# Altium PCB Flasher_2Ch_Astable.PcbDoc
Units mm, origin at the board's own origin, x right, y up, seen from the top; angles counter-clockwise.
Board outline 60 x 45 mm, 2 copper layers (Top Layer, Bottom Layer); 31 components, 16 nets, 65 pads, 0 vias.
Unrouted connection lines stored in the file: 1.
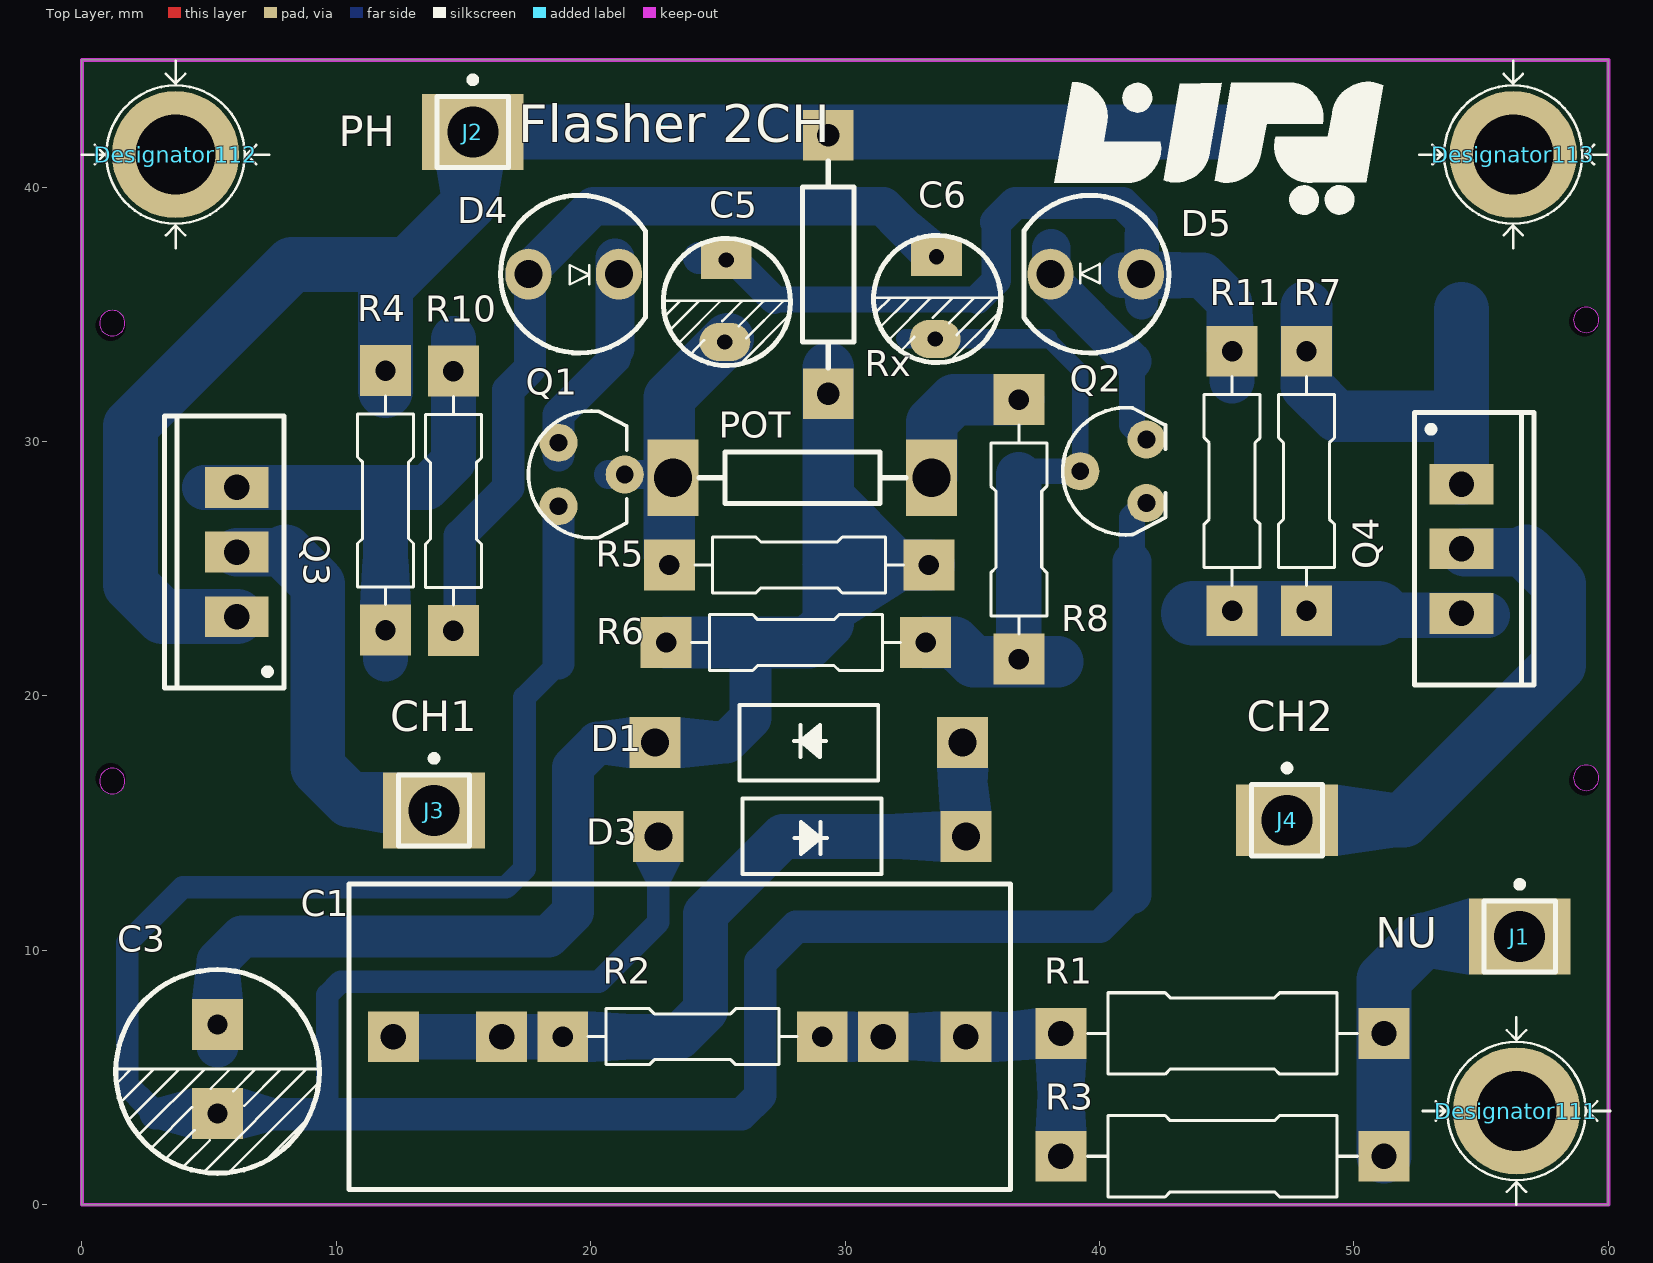
[diagram p0: Top Layer view]
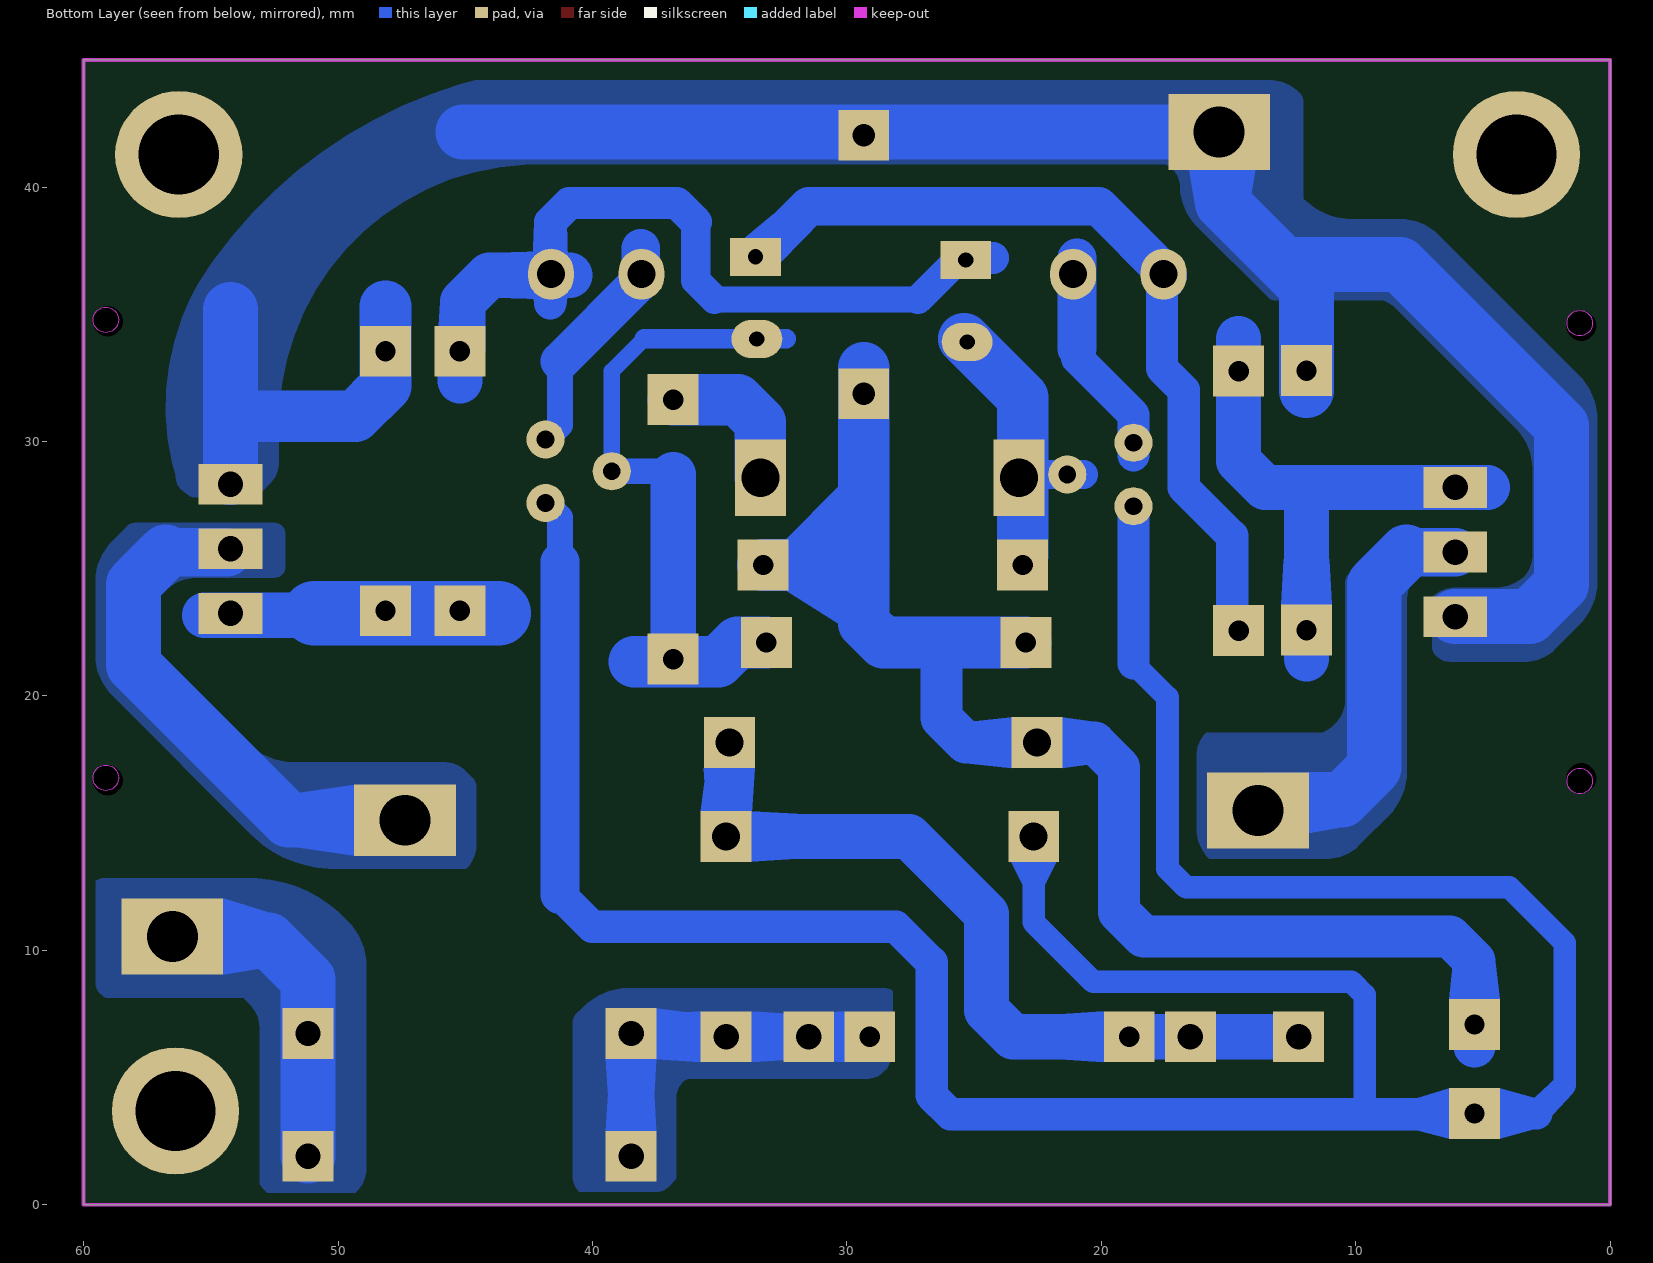
[diagram p1: Bottom Layer view, seen from below]
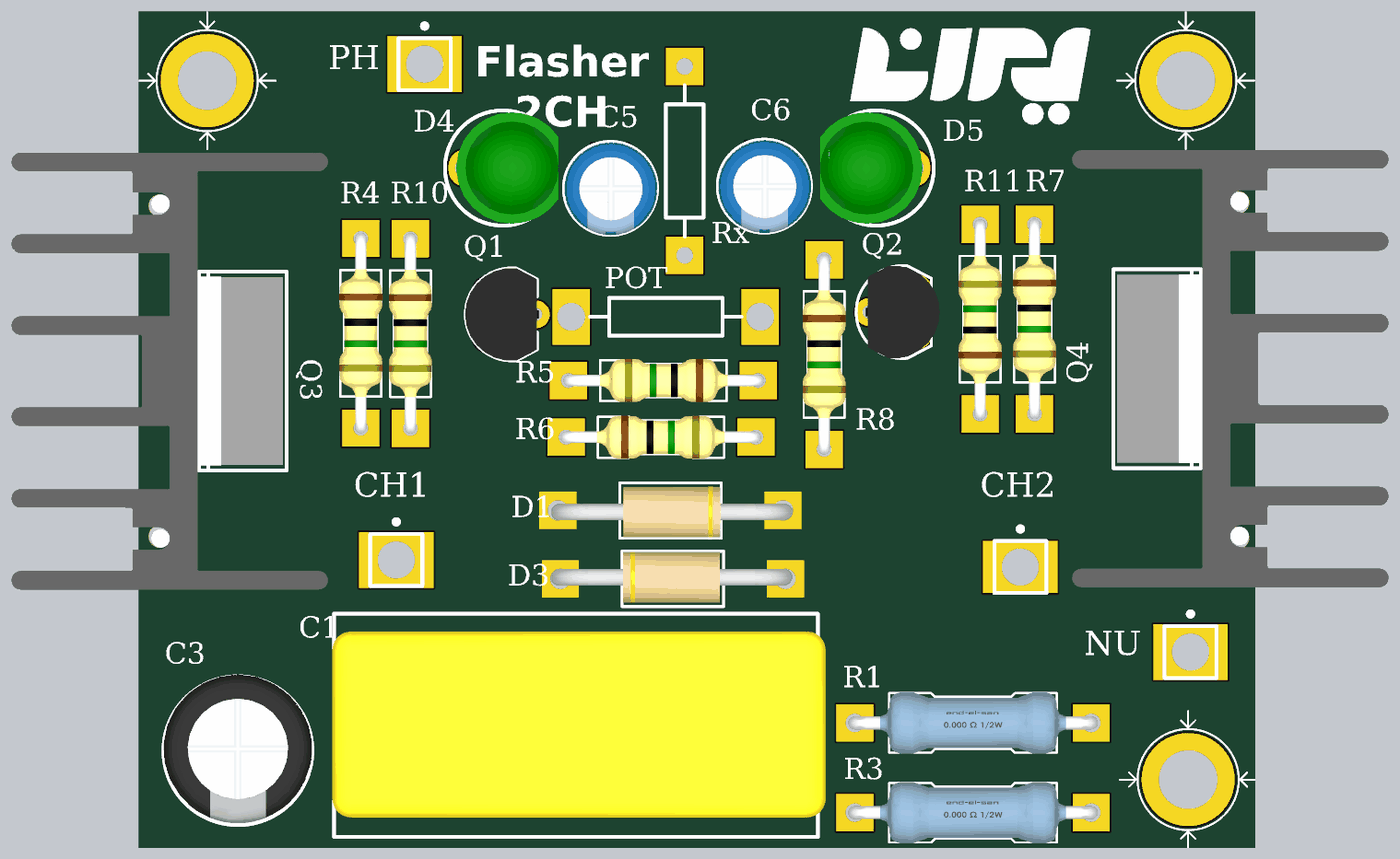
[diagram p2: 3D render of the assembled board from above, using the file's embedded part models]

## Layer stack, top to bottom
Top Solder: solder mask 0.0102, Solder Resist, Dk 3.5
Top Layer: signal copper 0.0356
Dielectric 1: dielectric 0.32, FR-4, Dk 4.8
Bottom Layer: signal copper 0.0356
Bottom Solder: solder mask 0.0102, Solder Resist, Dk 3.5

## Board outline
0,0 60,0 60,45 0,45

## Design rules (kind name [scope] priority, off if disabled: settings)
Clearance [All] p1: gap=0.381 ignorepadtopadclearanceinfootprint=TRUE except(0.254: Arc-THPad Track-THPad THPad-THPad; 0.279: Arc-Arc Arc-Track Track-Track)
PolygonConnect [All] p1: connectstyle=Direct reliefconductorwidth=0.254 reliefentries=4 polygonreliefangle="90 Angle" airgapwidth=0.254
RoutingVias [All] p1: holewidth=0.711 width=1.27 viastyle="Through Hole" minholewidth=0.711 minwidth=1.27 maxholewidth=0.711 maxwidth=1.27
SolderMaskExpansion [All] p1: expansion=0.102 istentingtop=FALSE
Width [All] p1: maxlimit=5.08 minlimit=0.254 preferedwidth=1.27 minimp=50.000000 maximp=50.000000 favimp=50.000000
30 further rules are at their usual default settings.

## Classes and differential pairs
component class Flasher_2Ch_Astable: C1 C3 C5 C6 D1 D3 D4 D5 J1 J2 J3 J4 POT Q1 Q2 Q3 Q4 R1 R2 R3 R4 R5 R6 R7 R8 R10 R11 Rx

## Components (designator, comment, footprint, x,y, rotation, side; value= is the part's Value field where it differs from the comment)
C1 "Cap" Cap_polyester_275V_P22.5 23.495,6.604 r0 top value=1uF/275V/X2
C3 "Cap2" "Cap electrolitic radial 8x12-3.5" 5.334,5.334 r270 top value=470uF/16V
C5 "Cap2" "CAP ELECTROLITIC RADIAL 5X11-2" 25.3,35.523 r270 top value=100uF/16V
C6 "Cap2" "CAP ELECTROLITIC RADIAL 5X11-2" 33.567,35.643 r270 top value=100uF/16V
D1 "Diode 1N4007" DO-204AL 28.702,18.288 r180 top
D3 "Diode 1N4007" DO-204AL 28.575,14.351 r0 top
D4 "LED0" LED5MM_RED 19.558,36.576 r0 top
D5 "LED0" LED5MM_RED 39.624,36.576 r180 top
Designator111 "Comment" "Board Screw simple 3mm" 56.388,3.683 r0 top
Designator112 "Comment" "Board Screw simple 3mm" 3.683,41.275 r0 top
Designator113 "Comment" "Board Screw simple 3mm" 56.261,41.275 r0 top
J1 "Socket" PIN1#1 56.515,10.541 r0 top
J2 "Socket" PIN1#1 15.367,42.164 r0 top
J3 "Socket" PIN1#1 13.843,15.494 r0 top
J4 "Socket" PIN1#2 47.371,15.113 r0 top
POT "Res Adj1" AXIAL-0.4 28.321,28.575 r0 top value=10K
Q1 "2N3904" "TO-92 CF REV" 19.936,28.702 r90 top
Q2 "2N3904" "TO-92 CF" 40.643,28.829 r270 top
Q3 "BT137-600" "TO-220 AB with heatsink ya25" 6.096,25.654 r90 top
Q4 "BT137-600" "TO-220 AB with heatsink ya25" 54.229,25.781 r270 top
R1 "Res1" "Axial 0_5W 5_0mm" 44.831,6.731 r0 top value=100/0.5W
R2 "Res1" "Axial 0_25 W, 0_4 IN LEAD PITCH" 24.003,6.604 r0 top value=470K
R3 "Res1" "Axial 0_5W 5_0mm" 44.831,1.905 r0 top value=100/0.5W
R4 "Res1" "Axial 0_25 W, 0_4 IN LEAD PITCH" 11.938,27.686 r270 top value="100 5%"
R5 "Res1" "Axial 0_25 W, 0_4 IN LEAD PITCH" 28.194,25.146 r180 top value=39K
R6 "Res1" "Axial 0_25 W, 0_4 IN LEAD PITCH" 28.067,22.098 r0 top value=39K
R7 "Res1" "Axial 0_25 W, 0_4 IN LEAD PITCH" 48.133,28.448 r270 top value="100 5%"
R8 "Res1" "Axial 0_25 W, 0_4 IN LEAD PITCH" 36.83,26.543 r270 top value=680R
R10 "Res1" "Axial 0_25 W, 0_4 IN LEAD PITCH" 14.605,27.666 r270 top value=560R
R11 "Res1" "Axial 0_25 W, 0_4 IN LEAD PITCH" 45.212,28.448 r90 top value=560R
Rx "Res1" axial-0.4 29.337,36.957 r90 top value=0R

## Footprints (in the part's own frame and the unit in brackets; to place one, negate y for a bottom-side part, rotate by r counter-clockwise, add the part's x,y. Pads: shape width x height; smd on the part's side, far side on the other; paste and mask are expansions set on the pad)
"Axial 0_5W 5_0mm" [mm] "Designer Abbas Basereh"
  rect 2x2 hole 1: 1(6.35,0) 2(-6.35,0)
  silkscreen extent -5.3,-1.6 5.3,1.6, body extent -6.7,-1.65 6.7,1.65, height 4.02
"Axial 0_25 W, 0_4 IN LEAD PITCH" [mm] "Designer Abbas Basereh"
  rect 2x2 hole 0.8: 1(5.1,0) 2(-5.1,0)
  silkscreen extent -4.1,-1.1 4.1,1.1, body extent -5.4,-1.16 5.36,1.16, height 3.63
AXIAL-0.4 [mm] "Axial Device, Thru-Hole; 2 Leads; 0.4 in Pin Spacing"
  rect 2x3 hole 1.5: 1(-5.08,0) 2(5.08,0)
  silkscreen extent -4.06,-1.02 4.06,1.02
axial-0.4 [mm] "Axial Device, Thru-Hole; 2 Leads; 0.4 in Pin Spacing"
  rect 2x2 hole 0.9: 1(-5.08,0) 2(5.08,0)
  silkscreen extent -4.06,-1.02 4.06,1.02
"Board Screw simple 3mm" [mm]
  round 5 hole 3.15 mask+0.1: S(0,0)
  silkscreen extent -3.68,-3.68 3.68,3.68
"CAP ELECTROLITIC RADIAL 5X11-2" [mm] "Cap electrolitic radial 5x11-2-Design:Abbas Basereh"
  rect 1.5x2 hole 0.6: 1(-1.613,0.027)
  oval 1.5x2 hole 0.6: 2(1.614,-0.027)
  silkscreen extent -2.46,-2.44 2.55,2.56, body extent -2.44,-2.42 2.56,2.57, height 11.3
"Cap electrolitic radial 8x12-3.5" [mm] "Cap electrolitic radial 8x12-3.5-Design:Abbas Basereh"
  rect 2x2 hole 0.8: 1(-1.75,0) 2(1.75,0)
  silkscreen extent -3.9,-4 4.1,4, body extent -4,-4 4,4, height 12.3
Cap_polyester_275V_P22.5 [mm]
  rect 2x2 hole 1: 1(11.25,0) 2(-11.25,0)
  silkscreen extent -13,-6 13,6, body extent -13.08,-4.95 13.42,5.05, height 20.6
DO-204AL [mm]
  rect 2x2 hole 1.1 mask+0: 1(-5.918,0.127) 2(6.172,0.127)
  silkscreen extent -2.6,-1.36 2.86,1.61, body extent -6.44,-1.14 6.54,1.58, height 2.72
LED5MM_RED [mm] "LED 5MM THROUGH HOLE RED-Designer Abbas Basereh"
  oval 1.8x2 hole 1.1: 1(-2.007,0) 2(1.549,0)
  silkscreen extent -3.1,-3.1 2.6,3.1, body extent -2.49,-3 3.01,3, height 9.14
PIN1#1 [mm] "Connector; Plug"
  rect 4x3 hole 2: 1(0,0)
  silkscreen extent -1.4,-1.4 1.4,2.17
PIN1#2 [mm]
  rect 4x2.8 hole 2: 1(0,0)
  silkscreen extent -1.4,-1.4 1.4,2.17
"TO-92 CF" [mm] "DESIGNER :ABBAS BASEREH"
  round 1.5 hole 0.7: 1(1.25,1.2) 2(0,-1.4) 3(-1.25,1.2)
  silkscreen extent -2.5,-2.09 2.5,1.96, body extent -2.5,-1.57 2.5,2.4, height 8.5
"TO-92 CF REV" [mm] "DESIGNER :ABBAS BASEREH"
  round 1.5 hole 0.7: 1(-1.25,1.2) 2(0,-1.4) 3(1.25,1.2)
  silkscreen extent -2.5,-1.48 2.5,2.38, body extent -2.5,-1.57 2.5,2.4, height 8.5
"TO-220 AB with heatsink ya25" [mm] "Epoxy meets UL94, V0-Design:Abbas Basereh"
  rect 1.6x2.5 hole 1: 1(-2.54,0) 2(0,0) 3(2.54,0)
  Keep-Out Layer board cut-out: -8.5,4.9 -8.538,5.091 -8.646,5.254 -8.809,5.362 -9,5.4 -9,5.4 -9.191,5.362 -9.354,5.254 -9.462,5.091 -9.5,4.9 -9.5,4.9 -9.5,4.9 -9.462,4.709 -9.354,4.546 -9.191,4.438 -9,4.4 -9,4.4 -8.809,4.438 -8.646,4.546 -8.538,4.709 -8.5,4.9 -8.5,4.9
  Keep-Out Layer board cut-out: 9.5,4.9 9.462,5.091 9.354,5.254 9.191,5.362 9,5.4 9,5.4 8.809,5.362 8.646,5.254 8.538,5.091 8.5,4.9 8.5,4.9 8.5,4.9 8.538,4.709 8.646,4.546 8.809,4.438 9,4.4 9,4.4 9.191,4.438 9.354,4.546 9.462,4.709 9.5,4.9 9.5,4.9
  silkscreen extent -5.35,-1.85 5.35,2.85, body extent -11.75,-4.08 11.75,12.92, height 25

## Part data
C1 C3 C5 C6: "Capacitor", Publisher="Altium Limited"
  C1: LatestRevisionDate=17-Jul-2002, LatestRevisionNote="Re-released for DXP Platform.", PackageDescription="Radial Cap, Thru-Hole; 2 Leads; 0.3 in Pin Spacing", PackageReference=RAD-0.3, Published=8-Jun-2000
  C3 C5 C6: PackageDescription="Capacitor; 2 Leads", PackageReference=CAPR5-4X5, Published=23-Sep-2002
D1 D3: "1 Amp General Purpose Rectifier", Code_JEDEC=DO-204-AL, ComponentLink1Description="Manufacturer Link", ComponentLink1URL=http://www.fairchildsemi.com/, ComponentLink2Description=Datasheet, ComponentLink2URL=http://www.fairchildsemi.com/ds/1N%2F1N4001.pdf, DatasheetVersion=1998, LatestRevisionDate=17-Jul-2002, LatestRevisionNote="Re-released for DXP Platform.", PackageDescription="Diode, Axial; Body 5.2 x 2.7 mm (LxDia. max), Lead Dia. 0.86 mm (max)", PackageReference=DO-41, PackageVersion=Aug-1999, Published=8-Jun-2000, Publisher="Altium Limited"
D4 D5: "Typical INFRARED GaAs LED", LatestRevisionDate=08-Jul-2005, LatestRevisionNote="Mech Layer 1 removed.", PackageDescription="LED; 2 Leads", PackageReference=LED-0, Published=8-Jun-2000, Publisher="Altium Limited"
POT: "Variable Resistor", LatestRevisionDate=17-Jul-2002, LatestRevisionNote="Re-released for DXP Platform.", PackageDescription="Axial Device, Thru-Hole; 2 Leads; 0.7 in Pin Spacing", PackageReference=AXIAL-0.7, Published=8-Jun-2000, Publisher="Altium Limited", Set Position=0.5
Q1 Q2: "NPN General Purpose Amplifier", ComponentLink1Description="Manufacturer Link", ComponentLink1URL=http://www.fairchildsemi.com/, ComponentLink2Description=Datasheet, ComponentLink2URL=http://www.fairchildsemi.com/ds/2N%2F2N3904.pdf, DatasheetVersion=1997, LatestRevisionDate=15-Jan-2003, LatestRevisionNote="PCB Footprint 'BCY-W3/D4.7' replaced", PackageDescription="TO, Flat Index; 3 In-Line, Axial Leads; Body Dia. 4.5mm; Leads 0.51 x 0.48 mm (max)", PackageReference=TO-92A, PackageVersion=Sep-1998, Published=8-Jun-2000, Publisher="Altium Limited"
Q3 Q4: library part Triac, "Silicon Bidirectional Triode Thyristor", ComponentLink1Description="Manufacturer Link", ComponentLink1URL=http://www.motorola.com/, DatasheetVersion=1999, LatestRevisionDate=17-Jul-2002, LatestRevisionNote="Re-released for DXP Platform.", Note="Pin 2 is electrically connected to Pin 4 (TAB)", PackageDescription="TO, Thru-Hole, Vertical, Heatsink Mounted; 3 In-Line Leads; Pitch 2.28 mm", PackageReference=369-03, Published=29-Sep-2000, Publisher="Altium Limited"
R1 R2 R3 R4 R5 R6 R7 R8 R10 R11 Rx: "Resistor", LatestRevisionDate=17-Jul-2002, LatestRevisionNote="Re-released for DXP Platform.", PackageDescription="Axial Device, Thru-Hole; 2 Leads; 0.3 in Pin Spacing", PackageReference=AXIAL-0.3, Published=8-Jun-2000, Publisher="Altium Limited"
J1 J2 J3 J4: LatestRevisionDate=17-Jul-2002, LatestRevisionNote="Re-released for DXP Platform.", Publisher="Altium Limited"

## Free pads (board coordinates)
  rect 2x2 hole 1: 2(31.5,6.604) 3(16.5,6.604)
  round 1 hole 1.2: ""(1.143,16.764) ""(1.143,34.544) ""(59.062,16.683) ""(59.062,34.717)

## Nets (pads, with @x,y where several pads share a name; then routed paths per layer and width w, separated by ;. In a path a pad name is that pad's centre, name@x,y a point inside that pad or via, vN(x,y) a via of type N, cw(c..) or ccw(c..) an arc to the next point about the centre after c; other vN are vias at no path point)
GND: C3.2 D3.1 Q1.1 Q2.1 | length 121.7
  Bottom Layer w0.889: 2.893,3.584 1.778,4.699 1.778,10.287 3.962,12.471 16.662,12.471 17.399,13.208 17.399,19.939 18.736,21.276 ; 9.652,3.584 9.652,8.242 10.173,8.763 20.32,8.763 22.657,11.1 D3.1
  Bottom Layer w1.016: 41.275,25.273 41.275,27.011 41.751,27.487 41.751,27.571 41.759,27.579 Q2.1
  Bottom Layer w1.27: 2.893,3.584 C3.2 5.362,3.556 25.926,3.556 26.67,4.3 26.67,9.525 28.067,10.922 40.005,10.922 41.275,12.192 ; 18.736,21.276 Q1.1
  Bottom Layer w1.524: 41.275,12.192 41.275,25.273
NetC1_1: C1.1 pad.2 R1.2 R2.1 R3.2 | length 14.3
  Bottom Layer w1.778: R2.1 C1.1 38.354,6.604 R1.2 R3.2
NetC1_2: C1.2 D1.1 D3.2 pad.3 R2.2 | length 31.7
  Bottom Layer w1.778: C1.2 R2.2 23.469,6.604 24.511,7.646 24.511,11.43 27.559,14.478 D3.2 34.62,14.605 D1.1
NetC5_1: C5.1 D5.1 R11.1 | length 32.3
  Bottom Layer w1.016: 27.199,35.58 35.197,35.58
  Bottom Layer w1.143: C5.1@25.568,37.211 27.199,35.58 ; 35.197,35.58 35.941,36.324 35.941,38.626
  Bottom Layer w1.27: 24.257,37.211 C5.1@25.568,37.211 ; 35.941,38.626 36.685,39.37 40.912,39.37 41.656,38.626 41.656,36.534 41.656,35.433
  Bottom Layer w1.778: D5.1@40.894,36.534 41.656,36.534 44.06,36.534 45.101,35.493 45.101,33.659 R11.1 45.212,32.385
NetC5_2: C5.2 POT.1 Q1.2 R5.1 | length 11.5
  Bottom Layer w0.889: POT.1@23.114,28.702 POT.1
  Bottom Layer w1.143: Q1.2@20.701,28.702 Q1.2 POT.1@23.114,28.702
  Bottom Layer w2.032: R5.1@23.094,25.527 POT.1@23.094,28.575 ; POT.1@23.094,29.083 23.094,31.73 C5.2@25.4,34.036
NetC6_1: C6.1 D4.1 R10.1 | length 33.3
  Bottom Layer w1.27: R10.1@14.859,22.586 14.859,26.289 16.764,28.194 16.764,32.025 17.611,32.872 17.611,36.01 17.399,36.222 D4.1@17.399,36.534
  Bottom Layer w1.524: D4.1@17.399,36.534 20.108,39.243 31.498,39.243 33.485,37.257 C6.1
NetC6_2: C6.2 Q2.2 R6.1 R8.1 | length 26.7
  Bottom Layer w0.635: 36.822,28.702 36.949,28.829 ; 37.973,34.036 39.243,32.766 Q2.2
  Bottom Layer w0.762: 32.385,34.036 37.973,34.036
  Bottom Layer w1.016: 36.949,28.829 Q2.2
  Bottom Layer w1.778: R8.1@36.822,21.451 36.822,28.702 ; R8.1@36.83,21.336 R8.1
  Bottom Layer w2.032: R6.1 34.29,22.098 35.052,21.336 36.83,21.336 38.354,21.336
NetD4_2: D4.2 Q1.3 | length 8.7
  Bottom Layer w1.143: 20.955,33.274 20.955,33.655
  Bottom Layer w1.27: Q1.3@18.736,29.464 Q1.3 18.736,31.055 20.955,33.274
  Bottom Layer w1.524: 20.955,33.655 20.955,36.534 D4.2@20.955,37.211
NetD5_2: D5.2 Q2.3 | length 9.1
  Bottom Layer w1.016: 41.275,33.151 41.275,30.647 41.751,30.171 41.751,30.087 41.759,30.079 Q2.3
  Bottom Layer w1.524: 38.1,37.592 38.1,36.326 41.275,33.151
NetJ1_1: J1.1 R1.1 R3.1 | length 13
  Bottom Layer w2.159: R3.1 51.181,8.856 52.739,10.414 56.388,10.414 J1.1
NetJ3_1: J3.1 Q3.2 | length 15.7
  Bottom Layer w1.905: Q3.2 7.492,25.654
  Bottom Layer w2.159: 8.006,25.654 9.271,24.389 9.271,17.179 10.536,15.914 13.423,15.914 J3.1
NetJ4_1: J4.1 Q4.2 | length 20.6
  Bottom Layer w1.905: Q4.2@54.356,25.654 56.774,25.654
  Bottom Layer w2.159: J4.1 51.943,15.113 58.039,21.209 58.039,24.389 56.774,25.654
NetPOT_2: POT.2 R8.2 | length 6
  Bottom Layer w2.032: POT.2 33.401,30.75 34.294,31.643 R8.2
OUT1: Q3.3 R4.1 R10.2 | length 21.7
  Bottom Layer w1.778: 4.826,28.194 Q3.3 11.938,28.194 ; 11.938,21.463 R4.1 11.938,28.194 ; 14.605,34.036 R10.2 14.605,29.235 13.563,28.194 11.938,28.194
OUT2: Q4.3 R7.1 R11.2 | length 11.9
  Bottom Layer w1.524: Q4.3@54.191,23.203 Q4.3
  Bottom Layer w1.778: 50.673,23.172 Q4.3@55.245,23.172
  Bottom Layer w2.54: 43.688,23.241 50.927,23.241
VCC: C3.1 D1.2 J2.1 Q3.1 Q4.1 R4.2 R5.2 R6.2 R7.2 Rx.1 Rx.2 | length 136.7
  Bottom Layer w1.651: C3.1@5.334,6.223 C3.1 5.334,9.574 6.301,10.541 18.337,10.541 19.304,11.508 19.304,17.194 20.271,18.161 D1.2 25.322,18.161 26.289,19.128 26.289,21.463
  Bottom Layer w2.032: R6.2 28.575,22.098 29.337,22.86 29.337,25.146 ; 29.337,32.893 Rx.1 29.337,25.146 ; R5.2 29.337,25.146 ; 48.133,35.306 R7.2 48.133,32.178 49.323,30.988 54.229,30.988
  Bottom Layer w2.159: Q3.1 3.17,23.114 1.905,24.379 1.905,30.607 8.255,36.957 12.827,36.957 ; R4.2@11.938,32.004 R4.2 11.938,36.068 12.827,36.957 ; 45.085,42.164 J2.1 15.24,42.037 15.24,39.37 12.827,36.957 ; Q4.1@54.229,28.575 54.229,30.988 54.229,35.179
pads on no net: Designator111.S Designator112.S Designator113.S

## Polygon pours and split planes (outlines as drawn)
NetJ4_1 on Bottom Layer "NETJ4_1_L02_P006" (solid, remove dead copper, pour order 6): 45.847,17.399 ccw(c45.847,16.173) 44.98,17.04 44.704,16.764 ccw(c45.011,16.457) 44.577,16.457 44.577,14.128 ccw(c45.878,14.128) 44.958,13.208 50.156,13.208 ccw(c50.156,17.829) 53.423,14.561 58.819,19.957 ccw(c57.023,21.753) 59.563,21.753 59.563,24.348 ccw(c57.023,24.348) 58.819,26.144 58.293,26.67 ccw(c57.986,26.363) 57.986,26.797 52.504,26.797 ccw(c52.504,26.363) 52.197,26.67 ccw(c52.504,26.363) 52.07,26.363 52.07,25.072 ccw(c52.504,25.072) 52.197,24.765 ccw(c52.504,25.072) 52.504,24.638 55.626,24.638 cw(c55.626,23.105) 56.71,24.189 57.023,23.876 57.023,21.59 53.576,18.143 cw(c51.78,19.939) 51.78,17.399
NetJ3_1 on Bottom Layer "NETJ3_1_L02_P005" (solid, remove dead copper, pour order 5): 15.875,18.542 cw(c14.955,17.622) 16.256,17.622 16.256,14.815 cw(c14.522,14.815) 15.748,13.589 11.176,13.589 cw(c11.176,15.429) 9.875,14.128 8.745,15.258 cw(c10.541,17.054) 8.001,17.054 8.001,23.666 ccw(c6.267,23.666) 7.493,24.892 cw(c8.106,25.505) 7.239,25.505 7.239,26.162 cw(c8.159,25.242) 8.159,26.543 8.255,26.543 cw(c8.255,25.93) 8.689,26.363 10.287,24.765 cw(c9.98,24.458) 10.414,24.458 10.414,19.812 ccw(c11.64,19.812) 10.773,18.945 10.922,18.796 ccw(c11.535,19.409) 11.535,18.542
VCC on Bottom Layer "VCC_L02_P004" (solid, remove dead copper, pour order 4): 52.324,29.263 ccw(c53.677,29.262) 52.72,28.306 53.213,27.813 55.693,27.813 ccw(c55.693,28.038) 55.881,27.913 ccw(c55.566,28.672) 56.388,28.672 ccw(c46.864,31.361) 55.499,36.195 55.881,35.56 ccw(c39.905,26.389) 44.622,44.196 13.418,44.196 ccw(c13.418,42.463) 12.192,43.688 ccw(c12.498,43.382) 12.065,43.381 12.065,39.55 cw(c10.099,41.515) 10.098,38.735 8.255,38.735 ccw(c8.254,36.59) 6.737,38.106 1.252,32.621 ccw(c3.047,30.825) 0.508,30.825 0.508,24.547 ccw(c3.048,24.547) 1.252,22.751 2.159,21.844 ccw(c3.385,23.07) 3.385,21.336 6.245,21.336 ccw(c6.245,22.203) 6.858,21.59 ccw(c6.552,21.896) 6.985,21.897 6.985,23.876 ccw(c6.066,22.958) 6.065,24.257 4.445,24.257 cw(c4.445,25.79) 3.361,24.706 cw(c4.117,25.462) 3.048,25.462 3.048,28.956 cw(c5.194,28.956) 3.677,30.474 8.509,35.306 cw(c9.122,34.693) 9.122,35.56 13.208,35.56 ccw(c13.208,35.867) 13.425,35.65 16.262,38.487 ccw(c14.745,40.005) 16.891,40.005 cw(c17.811,40.005) 17.16,40.655 17.272,40.767 cw(c17.578,40.461) 17.579,40.894 42.164,40.894 cw(c42.165,30.735) 52.324,30.734
NetC1_1 on Bottom Layer "NETC1_1_L02_P003" (solid, remove dead copper, pour order 3): 38.572,8.509 cw(c38.572,5.969) 40.368,7.765 40.64,7.493 cw(c40.333,7.186) 40.767,7.186 40.767,1.121 cw(c39.9,1.121) 40.513,0.508 37.465,0.508 cw(c37.465,1.121) 37.031,0.688 36.703,1.016 36.703,4.213 ccw(c35.836,4.213) 36.449,4.826 ccw(c36.142,4.519) 36.142,4.953 29.21,4.953 cw(c29.21,5.873) 28.56,5.222 28.448,5.334 cw(c28.755,5.641) 28.321,5.641 cw(c28.628,5.947) 28.194,5.947 28.194,8.382 cw(c28.501,8.075) 28.501,8.509
NetJ1_1 on Bottom Layer "NETJ1_1_L02_P002" (solid, remove dead copper, pour order 2): 59.309,12.827 53.423,12.827 ccw(c53.423,7.72) 49.812,11.331 49.639,11.158 ccw(c51.435,9.362) 48.895,9.362 48.895,1.428 ccw(c50.196,1.428) 49.276,0.508 ccw(c49.889,1.121) 49.889,0.254 52.324,0.254 ccw(c52.324,0.867) 52.758,0.434 52.959,0.635 ccw(c52.652,0.942) 53.086,0.942 53.086,6.985 cw(c54.312,6.985) 53.445,7.852 53.721,8.128 59.002,8.128 ccw(c59.002,8.562) 59.309,8.255 ccw(c58.696,8.868) 59.563,8.868 59.563,12.718

## Keep-outs
Keep-Out Layer:
  the board outline again, w0.152

## Silkscreen, mask and mechanical layers (free items; w line width, h text height)
Top Overlay:
  drawing of 7 lines, arcs and shapes, not listed
  text "Flasher 2CH" at 17.145,41.275 h2.54
  text "PH" at 10.096,41.212 h2.03
  text "CH1" at 12.128,18.224 h2.03
  text "CH2" at 45.783,18.224 h2.03
  text "NU" at 50.863,9.716 h2.03

## Dimensions
0,45 to 60,45 on Mechanical 7
0,0 to 0,45 on Mechanical 7